# EAGLE board 8irevB (EAGLE 6.6.0)

No outline drawn. Coordinates in mm, seen from the top.
Copper layers (1*16): Top 0.035mm / dielectric 1.5mm / Bottom 0.035mm
Design rules "10mils": minimum track width 10mil, minimum drill 24mil, track to track 10mil, track to pad 10mil, pad to pad 10mil, via to via 10mil, smd to smd 10mil, copper to edge 10mil, drill to drill 7mil, minimum pad ring 10mil, minimum via ring 8mil, stop-mask expansion 0mil, vias tented up to drill 0mil, thermal gap 10mil

## Footprints (pad centres in the part's own frame; a part is rotated, then mirrored left to right if it is on the bottom)
H960PANEL = hole 0.25: 0.312,0.875; 0.312,1.5; 0.312,0.25; 18.688,0.875; 18.688,1.5; 18.688,0.25; 0.312,2.625; 0.312,3.25; 0.312,2; 18.688,2.625; 18.688,3.25; 18.688,2; 0.312,4.375; 0.312,5; 0.312,3.75; 18.688,4.375; 18.688,5; 18.688,3.75; 0.312,6.125; 0.312,6.75; 0.312,5.5; 18.688,6.125; 18.688,6.75; 18.688,5.5; 0.312,7.875; 0.312,8.5; 0.312,7.25; 18.688,7.875; 18.688,8.5; 18.688,7.25; 0.312,9.625; 0.312,10.25; 0.312,9; 18.688,9.625; 18.688,10.25; 18.688,9; 0.312,11.375; 0.312,12; 0.312,10.75; 18.688,11.375; 18.688,12; 18.688,10.75; 0.312,13.125; 0.312,13.75; 0.312,12.5; 18.688,13.125; 18.688,13.75; 18.688,12.5; 0.312,14.875; 0.312,15.5; 0.312,14.25; 18.688,14.875; 18.688,15.5; 18.688,14.25; 0.312,16.625; 0.312,17.25; 0.312,16; 18.688,16.625; 18.688,17.25; 18.688,16; 0.312,18.375; 0.312,19; 0.312,17.75; 18.688,18.375; 18.688,19; 18.688,17.75; 0.312,20.125; 0.312,20.75; 0.312,19.5; 18.688,20.125; 18.688,20.75; 18.688,19.5; 0.312,21.875; 0.312,22.5; 0.312,21.25; 18.688,21.875; 18.688,22.5; 18.688,21.25; 0.312,23.625; 0.312,24.25; 0.312,23; 18.688,23.625; 18.688,24.25; 18.688,23; 0.312,25.375; 0.312,26; 0.312,24.75; 18.688,25.375; 18.688,26; 18.688,24.75; 0.312,27.125; 0.312,27.75; 0.312,26.5; 18.688,27.125; 18.688,27.75; 18.688,26.5; 0.312,28.875; 0.312,29.5; 0.312,28.25; 18.688,28.875; 18.688,29.5; 18.688,28.25; 0.312,30.625; 0.312,31.25; 0.312,30; 18.688,30.625; 18.688,31.25; 18.688,30; 0.312,-30.625; 0.312,-30; 0.312,-31.25; 18.688,-30.625; 18.688,-30; 18.688,-31.25; 0.312,-28.875; 0.312,-28.25; 0.312,-29.5; 18.688,-28.875; 18.688,-28.25; 18.688,-29.5; 0.312,-27.125; 0.312,-26.5; 0.312,-27.75; 18.688,-27.125; 18.688,-26.5; 18.688,-27.75; 0.312,-25.375; 0.312,-24.75; 0.312,-26; 18.688,-25.375; 18.688,-24.75; 18.688,-26; 0.312,-23.625; 0.312,-23; 0.312,-24.25; 18.688,-23.625; 18.688,-23; 18.688,-24.25; 0.312,-21.875; 0.312,-21.25; 0.312,-22.5; 18.688,-21.875; 18.688,-21.25; 18.688,-22.5; 0.312,-20.125; 0.312,-19.5; 0.312,-20.75; 18.688,-20.125; 18.688,-19.5; 18.688,-20.75; 0.312,-18.375; 0.312,-17.75; 0.312,-19; 18.688,-18.375; 18.688,-17.75; 18.688,-19; 0.312,-16.625; 0.312,-16; 0.312,-17.25; 18.688,-16.625; 18.688,-16; 18.688,-17.25; 0.312,-14.875; 0.312,-14.25; 0.312,-15.5; 18.688,-14.875; 18.688,-14.25; 18.688,-15.5; 0.312,-13.125; 0.312,-12.5; 0.312,-13.75; 18.688,-13.125; 18.688,-12.5; 18.688,-13.75; 0.312,-11.375; 0.312,-10.75; 0.312,-12; 18.688,-11.375; 18.688,-10.75; 18.688,-12; 0.312,-9.625; 0.312,-9; 0.312,-10.25; 18.688,-9.625; 18.688,-9; 18.688,-10.25; 0.312,-7.875; 0.312,-7.25; 0.312,-8.5; 18.688,-7.875; 18.688,-7.25; 18.688,-8.5; 0.312,-6.125; 0.312,-5.5; 0.312,-6.75; 18.688,-6.125; 18.688,-5.5; 18.688,-6.75; 0.312,-4.375; 0.312,-3.75; 0.312,-5; 18.688,-4.375; 18.688,-3.75; 18.688,-5; 0.312,-2.625; 0.312,-2; 0.312,-3.25; 18.688,-2.625; 18.688,-2; 18.688,-3.25; 0.312,-0.875; 0.312,-0.25; 0.312,-1.5; 18.688,-0.875; 18.688,-0.25; 18.688,-1.5

## Placement (x,y rotation side)
E$1  TC01  [9U]  -0.25,36.75 0 bottom
E$2  [H960PANEL]  40.25,31.5 0 top
E$3  TU10  [15U]  80.5,36.75 0 top
E$4  [H960PANEL]  59.5,31.5 0 top
E$5  [H960PANEL]  80.5,31.5 0 top
U$1  [H960PANEL]  0,31.5 0 top
U$2  MM8I  [6U]  19,42 0 bottom
U$3  MM8I  [6U]  19.25,52.5 0 bottom
U$4  MM8I  [6U]  0,42 0 top
U$5  PDP8-I  [18U]  0,0 0 top
U$6  [H960PANEL]  -19.25,31.5 0 top
U$7  RK05F  [6U]  19.25,10.5 0 top
U$8  FAN  [3U]  -19.25,31.5 0 top
U$9  [H960PANEL]  19.25,31.5 0 top
U$10  FPP12A  [18U]  -19.25,0 0 top
U$11  RK05J  [6U]  19.25,21 0 top
U$12  DM04  [3U]  19,36.75 0 bottom
U$13  DW8E/RK8F  [6U]  19.25,52.5 0 top
U$14  TU55  [6U]  -19.25,47.25 0 top
U$15  DT Rack  [6U]  -19.25,36.75 0 top
U$16  DW08  [3U]  0,57.75 0 bottom
U$17  PC04  [6U]  0,31.5 0 top
U$18  DSD  [3U]  80.5,31.5 0 top
U$19  TU56PWR  [3U]  40.25,36.75 0 top
U$20  874  [3U]  38.25,5.25 0 bottom
U$21  BUSSTOP  [3U]  0,52.5 0 top
U$22  PDP8E  [6U]  40.25,15.75 0 top
U$23  PDP8L  [6U]  59.5,52.5 0 top
U$24  BA08  [6U]  59.5,42 0 top
U$25  RX02  [6U]  19.25,31.5 0 top
U$26  PDP8L  [6U]  40.25,42 0 top
U$27  BM8L  [6U]  40.25,52.5 0 top
U$28  PDP8A  [6U]  80.5,21 0 top
U$29  RL02  [6U]  80.5,10.5 0 top
U$30  RL02  [6U]  80.5,0 0 top
U$31  RX08  [3U]  38.25,36.75 0 bottom
U$32  TU56  [6U]  40.25,26.25 0 top
U$33  TU56M  [6U]  59.5,31.5 0 top
U$34  AD01  [3U]  0,57.75 0 top
U$35  VT01  [6U]  19.25,42 0 top
U$36  RF08X  [3U]  40.25,10.5 0 top
U$37  PDP8-I  [18U]  59.5,0 0 top
U$38  TU56PWR  [3U]  78.5,36.81 0 bottom
U$39  TU55PWR  [3U]  -19.25,57.75 0 top
U$40  874  [3U]  59.25,0 0 bottom

## Library data of the parts
E$1-E$5 U$1-U$40 = rack